# Altium PCB PCB-Support-STM32F407-2layers-polygon-EMI.PcbDoc (part 2 of 3)
Units mm, origin at the board's own origin, x right, y up, seen from the top; angles counter-clockwise.
Board outline 200 x 110 mm, 2 copper layers (Top Layer, Bottom Layer), stack 1.569 mm thick; 116 components, 132 nets, 504 pads, 174 vias.
Unrouted connection lines stored in the file: 143.
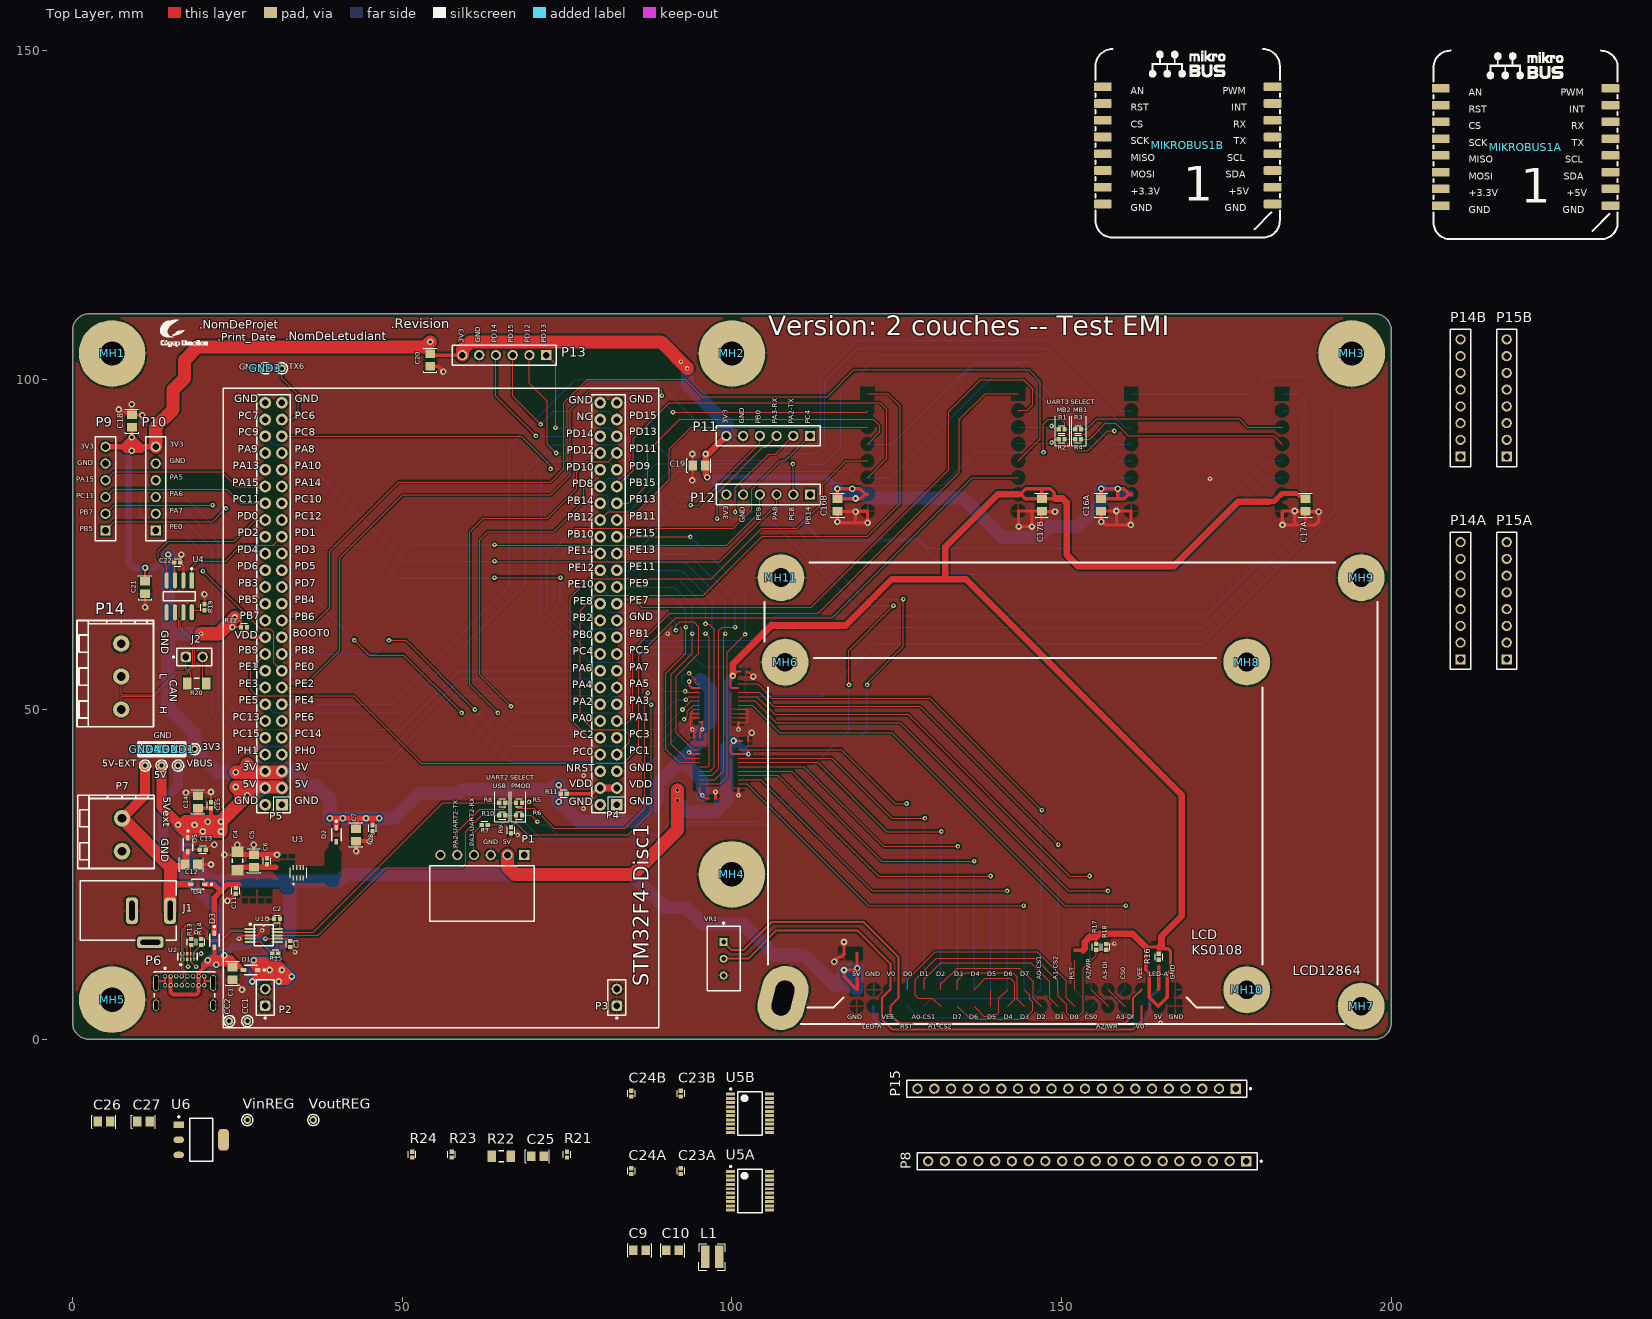
[diagram p0: Top Layer view]

## Via types
v1: diameter 0.7, hole 0.3, Top Layer to Bottom Layer, tented both sides, 92 vias
v2: diameter 1, hole 0.5, Top Layer to Bottom Layer, tented both sides, 80 vias
v3: diameter 0.6, hole 0.52, Top Layer to Bottom Layer, tented both sides, 2 vias

## Nets (pads, with @x,y where several pads share a name; then routed paths per layer and width w, separated by ;. In a path a pad name is that pad's centre, name@x,y a point inside that pad or via, vN(x,y) a via of type N, cw(c..) or ccw(c..) an arc to the next point about the centre after c; other vN are vias at no path point) (continued)
PD14: (continued)
  Bottom Layer w0.15: v1(70.25,91.5) 70.28,91.47 79.98,91.47 P4.46@80.01,91.44
PD15: P4.47 P13.3 | length 25.2
  Top Layer w0.15: P13.3@66.75,103.75 66.75,97.5 v1(71,93.25)
  Bottom Layer w0.15: v1(71,93.25) 73,95.25 81.28,95.25 P4.47@82.55,93.98
PE0/CS_B: P5.17 P10.1 | length 32.3
  Top Layer w0.15: v1(19.75,71) 28.5,62.25 30,62.25 30.5,61.75 30.5,59.144 30.5,57.13 P5.17@31.75,55.88
  Bottom Layer w0.15: P10.1@12.62,77.15 16.35,77.15 19.75,73.75 v1(19.75,71)
PE2/RST: MIKROBUS1B.2 P5.15 P14B.2 | length 124
  Top Layer w0.15: P5.15@31.75,53.34 34.84,53.34 40.5,59 40.5,73 50.055,82.555 72.555,82.555 75.5,85.5 75.5,95.5 78.5,98.5 89.275,98.5 89.362,98.412 v1(89.362,97.605) ; v1(91.065,95.113) 120.333,95.113 120.57,95.35
  Bottom Layer w0.15: v1(89.362,97.605) 89.362,96.816 v1(91.065,95.113)
PE4/RST: MIKROBUS1A.2 P5.13 P14A.2 | length 182.7
  Bottom Layer w0.15: P5.13@31.75,50.8 48.3,50.8 66.25,68.75 66.25,90 76.25,100 88.318,100 98.521,89.797 112.527,89.797 113.5,90.769 113.5,100.5 119,106 148.221,106 158.871,95.35 160.57,95.35
PE5/CS: MIKROBUS1A.3 P5.14 P14A.3 | length 177.4
  Bottom Layer w0.15: P5.14@29.21,50.8 30.465,49.545 49.295,49.545 68.75,69 68.75,86 72.92,90.17 88.555,90.17 90.946,87.779 105.927,87.779 107.008,88.86 112.86,88.86 114.09,90.09 114.09,99.806 119.103,104.819 147.586,104.819 159.595,92.81 160.57,92.81
PE7/INT: MIKROBUS1B.15 P4.25 P15B.2 | length 88.3
  Top Layer w0.15: P4.25@82.55,66.04 85.765,66.04 86.305,65.5 112,65.5 132.894,86.394 132.894,95.144 137.75,100 144.271,100 145.639,98.632 145.639,96.249 144.783,95.393 143.473,95.393 143.43,95.35
  Bottom Layer w0.15: P4.25@82.55,66.04 P4.25@82.59,66

## Text inside footprints (layer, text, board x,y; h text height)
MIKROBUS1B: Top Overlay "1" at 168.415,125.4 h8.89; Top Overlay "SDA" at 174.9,130.246 h1.78; Top Overlay "RST" at 160.465,140.406 h1.78; Top Overlay "CS" at 160.465,137.866 h1.78; Top Overlay "MISO" at 160.465,132.786 h1.78; Top Overlay "SCK" at 160.465,135.326 h1.78; Top Overlay "MOSI" at 160.465,130.246 h1.78; Top Overlay "+3.3V" at 160.465,127.706 h1.78; Top Overlay "GND" at 160.465,125.166 h1.78; Top Overlay "SCL" at 175.133,132.786 h1.78; Top Overlay "INT" at 175.718,140.406 h1.78; Top Overlay "RX" at 176.027,137.866 h1.78; Top Overlay "TX" at 176.116,135.326 h1.78; Top Overlay "GND" at 174.74,125.166 h1.78; Top Overlay "+5V" at 175.324,127.706 h1.78; Top Overlay "AN" at 160.465,142.946 h1.78; Top Overlay "PWM" at 174.455,142.946 h1.78